# Altium PCB PCB.PcbDoc
Units mil, origin at the board's own origin, x right, y up, seen from the top; angles counter-clockwise.
Board outline 6000 x 4000 mil, 2 copper layers (Top Layer, Bottom Layer); 37 components, 25 nets, 108 pads, 0 vias.
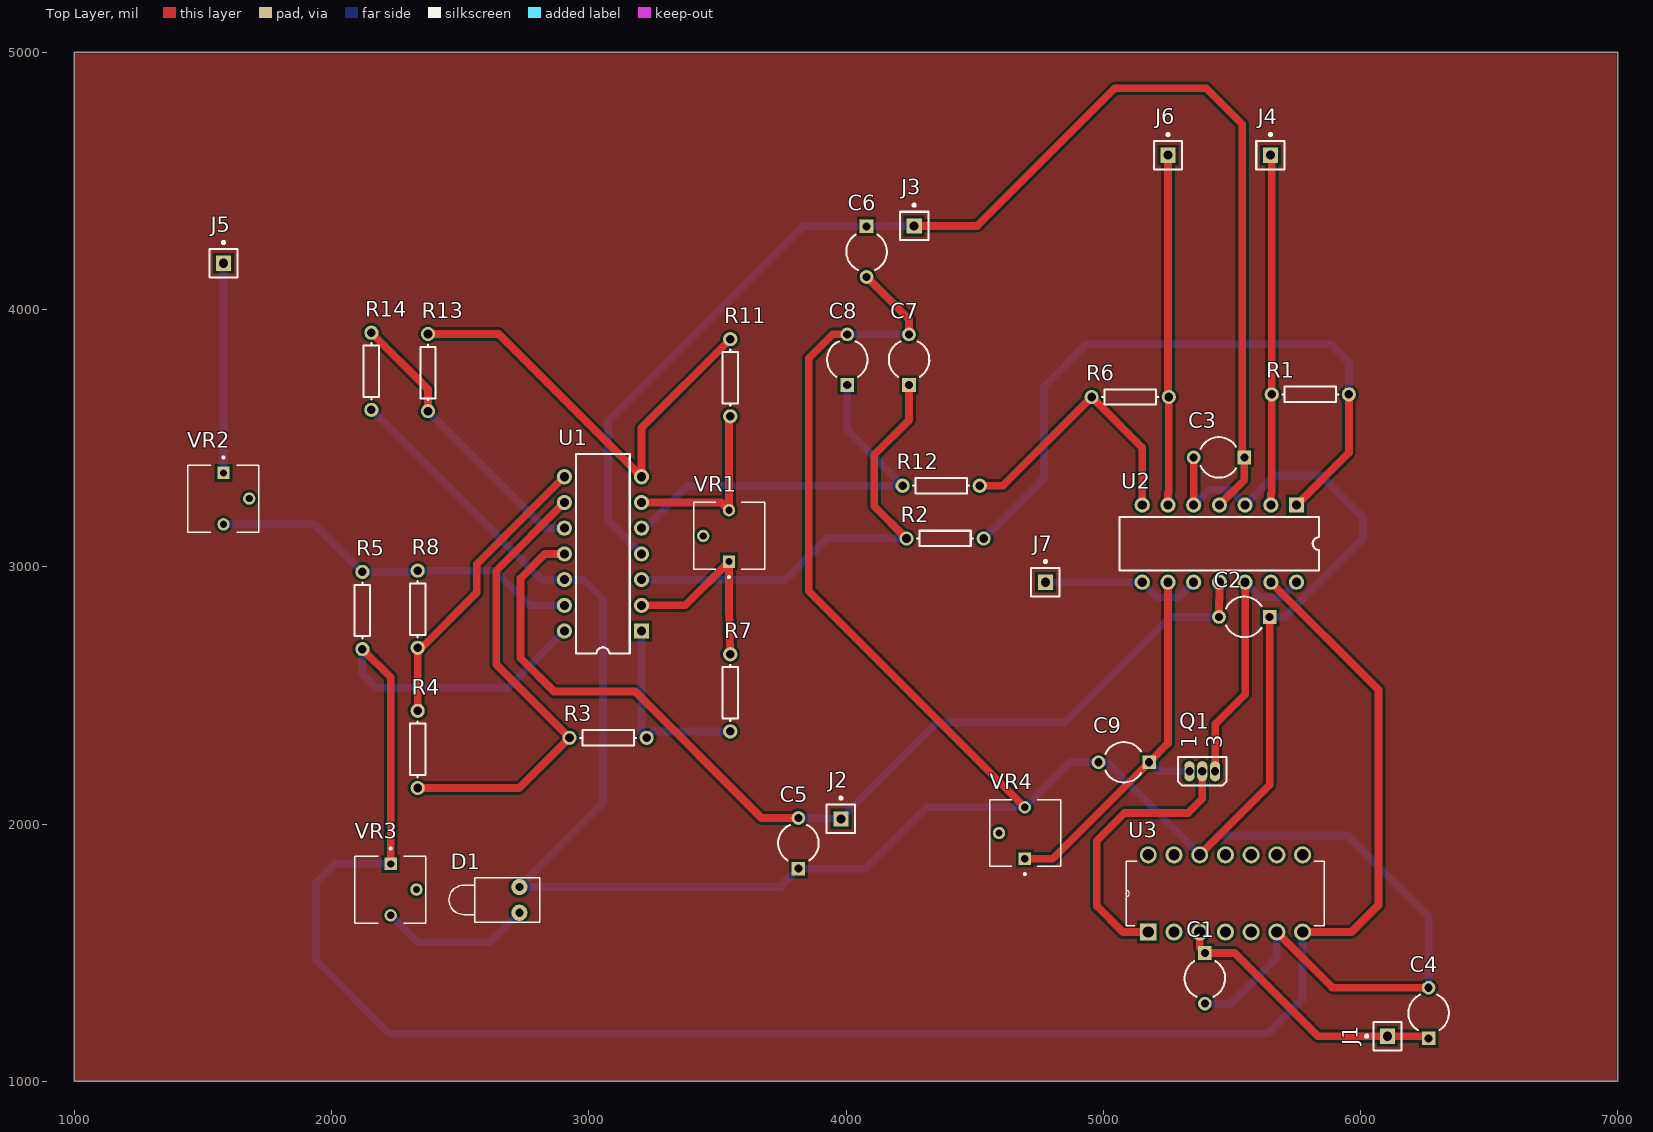
[diagram p0: Top Layer view]
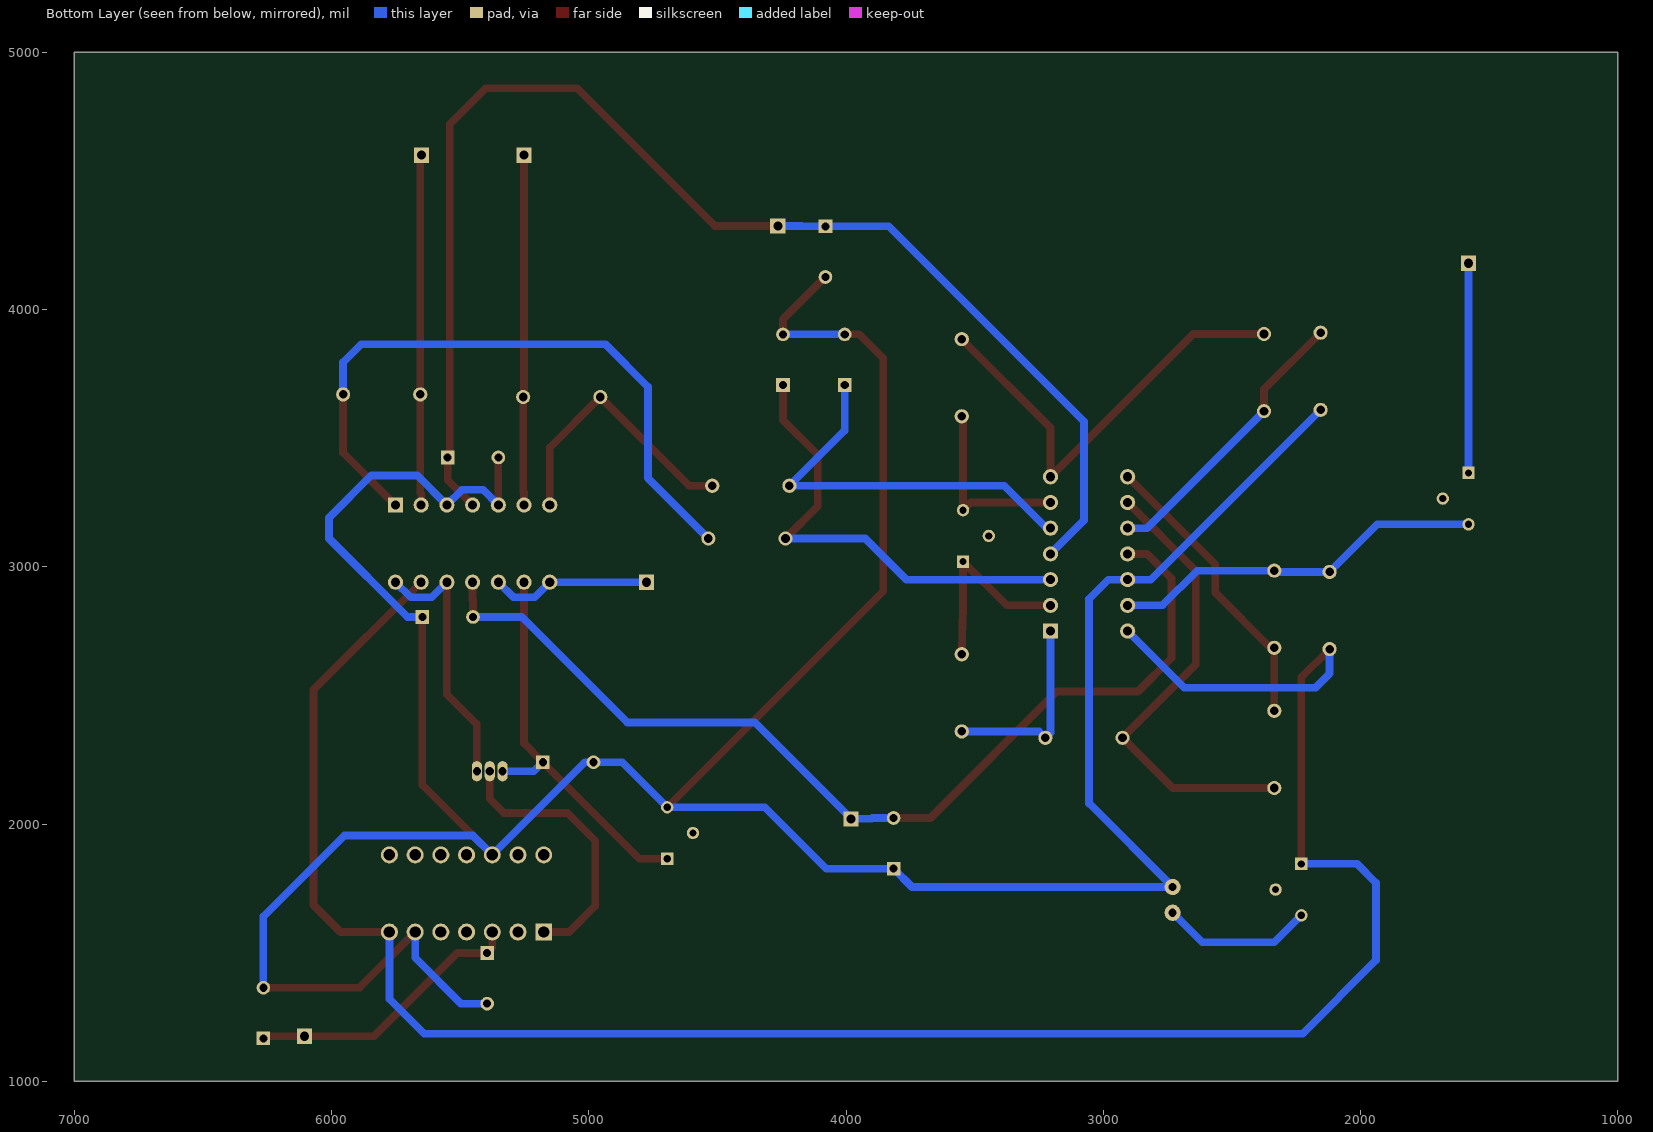
[diagram p1: Bottom Layer view, seen from below]

## Layer stack, top to bottom
Top Solder: solder mask 0.4, Solder Resist, Dk 3.5
Top Layer: signal copper 1.4
Dielectric 1: dielectric 12.6, FR-4, Dk 4.8
Bottom Layer: signal copper 1.4
Bottom Solder: solder mask 0.4, Solder Resist, Dk 3.5

## Board outline
1000,1000 7000,1000 7000,5000 1000,5000

## Design rules (kind name [scope] priority, off if disabled: settings)
Clearance [All] p1: gap=10 ignorepadtopadclearanceinfootprint=FALSE except(0: Arc-Hole Track-Hole SMDPad-Hole THPad-Hole Via-Hole Fill-Hole Poly-Hole Region-Hole Text-Hole)
PolygonConnect [All] p1: connectstyle=Relief reliefconductorwidth=10 reliefentries=4 polygonreliefangle="90 Angle" airgapwidth=10
RoutingVias [All] p1: holewidth=28 width=50 viastyle="Through Hole" minholewidth=28 minwidth=50 maxholewidth=28 maxwidth=50
SolderMaskExpansion [All] p1: expansion=4
Width [All] p1: maxlimit=30 minlimit=10 preferedwidth=30
30 further rules are at their usual default settings.

## Classes and differential pairs
component class Sheet1: C1 C2 C3 C4 C6 C7 C8 C9 D1 J1 J2 J3 J4 J5 J6 J7 Q1 R1 R2 R3 R4 R5 R6 R7 R8 R11 R12 R13 R14 U2 U3 VR1 VR2 VR4

## Components (designator, comment, footprint, x,y, rotation, side; value= is the part's Value field where it differs from the comment)
C1 "Cap2" CAPR5-4X5 5395,1400 r270 top value=100nF
C2 "Cap2" CAPR5-4X5 5548.43,2805 r180 top value=100pF
C3 "Cap2" CAPR5-4X5 5450,3425 r180 top value=100nF
C4 "Cap2" CAPR5-4X5 6265,1265 r90 top value=1uF
C5 "Cap2" CAPR5-4X5 3815,1925 r90 top value=1uF
C6 "Cap2" CAPR5-4X5 4080,4225 r270 top value=1uF
C7 "Cap2" CAPR5-4X5 4245,3805 r90 top value=100nF
C8 "Cap2" CAPR5-4X5 4005,3805 r90 top value=100nF
C9 "Cap2" CAPR5-4X5 5080,2240 r180 top value=100nF
D1 "LED1" LED-1 2730,1705 r180 top
J1 "Socket" PIN1 6105,1175 r90 top
J2 "Socket" PIN1 3980,2020 r0 top
J3 "Socket" PIN1 4265,4325 r0 top
J4 "Socket" PIN1 5650,4600 r0 top
J5 "Socket" PIN1 1580,4180 r0 top
J6 "Socket" PIN1 5251.57,4600 r0 top
J7 "Socket" PIN1 4775,2940 r0 top
Q1 "MOSFET-N" E3 5385,2205 r90 top
R1 "Res1" AXIAL-0.3 5805,3670 r0 top value=560K
R2 "Res1" AXIAL-0.3 4385,3110 r180 top value=150K
R3 "Res1" AXIAL-0.3 3075,2335 r180 top value=1K
R4 "Res1" AXIAL-0.3 2335,2290 r90 top value=1K
R5 "Res1" AXIAL-0.3 2120,2830 r270 top value=1K
R6 "Res1" AXIAL-0.3 5105,3660 r180 top value=560K
R7 "Res1" AXIAL-0.3 3550,2510 r270 top value=4.7K
R8 "Res1" AXIAL-0.3 2335,2835 r90 top value=1K
R11 "Res1" AXIAL-0.3 3550,3735 r270 top value=4.7K
R12 "Res1" AXIAL-0.3 4370,3315 r180 top value=150K
R13 "Res1" AXIAL-0.3 2375,3755 r270 top value=1K
R14 "Res1" AXIAL-0.3 2155,3760 r270 top value=1K
U1 "LM348N" N014 3055,3050 r90 top
U2 "LM348N" N014 5451.57,3090 r180 top
U3 "LM2901N" *DIP254P762X508-14 5775,1880 r90 top
VR1 "3362P-1-503LF" *TRIM_3362P-1-503LF 3545,3120 r90 top
VR2 "3362P-1-503LF" *TRIM_3362P-1-503LF 1580,3265 r270 top
VR3 "3362P-1-503LF" *TRIM_3362P-1-503LF 2230,1745 r270 top
VR4 "3362P-1-503LF" *TRIM_3362P-1-503LF 4695,1965 r90 top

## Footprints (in the part's own frame and the unit in brackets; to place one, negate y for a bottom-side part, rotate by r counter-clockwise, add the part's x,y. Pads: shape width x height; smd on the part's side, far side on the other; paste and mask are expansions set on the pad)
*DIP254P762X508-14 [mil]
  rect 66x66 hole 44: 1(-300,600)
  round 66 hole 44: 2(-300,500) 3(-300,400) 4(-300,300) 5(-300,200) 6(-300,100) 7(-300,0) 8(0,0) 9(0,100) 10(0,200) 11(0,300) 12(0,400) 13(0,500) 14(0,600)
  silkscreen extent -275,-85 -25,685
*TRIM_3362P-1-503LF [mil]
  rect 48.11x48.11 hole 28.11: 1(-100,0)
  round 48.11 hole 28.11: 2(0,100) 3(100,0)
  silkscreen extent -164,-139 130,137
AXIAL-0.3 [mm] "Axial Device, Thru-Hole; 2 Leads; 0.3 in Pin Spacing"
  round 1.4 hole 0.85: 1(-3.81,0) 2(3.81,0)
  silkscreen extent -2.77,-0.76 2.77,0.76
CAPR5-4X5 [mm] "Capacitor; 2 Leads"
  rect 1.35x1.35 hole 0.8: 1(-2.5,0)
  round 1.35 hole 0.8: 2(2.5,0)
  silkscreen extent -1.69,-2 1.82,2
E3 [mm] "TO, Flat Index; 3 In-Line, Axial Leads; Body Dia. 4.6mm; Lead Dia. 0.5 mm (max)"
  oval 2x1 hole 0.8: 1(0,1.27) 2(0,0) 3(0,-1.27)
  silkscreen extent -1.41,-2.41 1.41,2.41
LED-1 [mm] "LED; 2 Leads"
  round 1.6 hole 0.8: 1(0,1.27) 2(0,-1.27)
  silkscreen extent -2,-2.2 6.95,2.2
N014 [mm] "DIP; 14 Leads; Row Spacing 7.62 mm; Pitch 2.54 mm"
  rect 1.5x1.5 hole 0.9: 1(-7.62,-3.81)
  round 1.5 hole 0.9: 2(-5.08,-3.81) 3(-2.54,-3.81) 4(0,-3.81) 5(2.54,-3.81) 6(5.08,-3.81) 7(7.62,-3.81) 8(7.62,3.81) 9(5.08,3.81) 10(2.54,3.81) 11(0,3.81) 12(-2.54,3.81) 13(-5.08,3.81) 14(-7.62,3.81)
  silkscreen extent -9.85,-2.65 9.85,2.65
PIN1 [mm] "Connector; Plug"
  rect 1.5x1.5 hole 0.9: 1(0,0)
  silkscreen extent -1.4,-1.4 1.4,2.17

## Part data
C1 C2 C3 C4 C5 C6 C7 C8 C9: "Capacitor", PackageDescription="Capacitor; 2 Leads", PackageReference=CAPR5-4X5, Published=23-Sep-2002, Publisher="Altium Limited"
D1: "Typical RED GaAs LED", LatestRevisionDate=08-Jul-2005, LatestRevisionNote="Mech Layer 1 removed.", PackageDescription="LED; 2 Leads", PackageReference=LED-1, Published=8-Jun-2000, Publisher="Altium Limited"
Q1: "N-Channel MOSFET", LatestRevisionDate=17-Jul-2002, LatestRevisionNote="Re-released for DXP Platform.", PackageDescription="TO, Flat Index; 3 In-Line, Axial Leads; Body Dia. 4.6mm; Lead Dia. 0.5 mm (max)", PackageReference=E3, PackageVersion=1995/1996, Published=8-Jun-2000, Publisher="Altium Limited"
R1 R2 R3 R4 R5 R6 R7 R8 R11 R12 R13 R14: "Resistor", LatestRevisionDate=17-Jul-2002, LatestRevisionNote="Re-released for DXP Platform.", PackageDescription="Axial Device, Thru-Hole; 2 Leads; 0.3 in Pin Spacing", PackageReference=AXIAL-0.3, Published=8-Jun-2000, Publisher="Altium Limited"
U1 U2: "Quadruple Operational Amplifier", ComponentLink1Description="Manufacturer Link", ComponentLink1URL=http://www.ti.com/, ComponentLink2Description=Datasheet, ComponentLink2URL=http://www-s.ti.com/sc/ds/lm348.pdf, DatasheetVersion=Aug-1996, LatestRevisionDate=04-Mar-2005, LatestRevisionNote="Stylized 3D Model Added.", PackageDescription="DIP; 14 Leads; Row Spacing 7.62 mm; Pitch 2.54 mm", PackageReference=N014, PackageVersion=Oct-1995, Published=16-Jan-2001, Publisher="Altium Limited"
U3: "Low Power Low Offset Voltage Quad Comparator 14-PDIP -40 to 85", Package="PDIP-14 Texas Instruments", Availability=Unavailable, MF="Texas Instruments", MP=LM2901N/NOPB, Price=None, SnapEDA_Link=https://www.snapeda.com/parts/LM2901N/NOPB/Texas%20Instruments/view-part/?ref=snap
VR1 VR2 VR3 VR4: "Res Cermet Trimmer 50K Ohm 10% 1/2W 1_Elec_/1_Mech_Turn 2.77mm _6.6 X 6.99 X 4.7mm_ Pin Thru-Hole Tube", Package=Bourns, Digi-Key_Part_Number=3362P-503LF-ND, Digi-Key_Purchase_URL=https://www.digikey.co.nz/product-detail/en/bourns-inc/3362P-1-503LF/3362P-503LF-ND/1003342?utm_source=snapeda&utm_medium=aggregator&utm_campaign=symbol, MF=Bourns, MP=3362P-1-503LF, SnapEDA_Link=https://www.snapeda.com/parts/3362P-1-503LF/Bourns%20-%20J.W.%20Miller/view-part/?ref=snap
J1 J2 J3 J4 J5 J6 J7: LatestRevisionDate=17-Jul-2002, LatestRevisionNote="Re-released for DXP Platform.", Publisher="Altium Limited"

## Nets (pads, with @x,y where several pads share a name; then routed paths per layer and width w, separated by ;. In a path a pad name is that pad's centre, name@x,y a point inside that pad or via, vN(x,y) a via of type N, cw(c..) or ccw(c..) an arc to the next point about the centre after c; other vN are vias at no path point)
+VCC: C3.1 C6.1 J3.1 U1.4 U2.4 | length 5151.9
  Top Layer w30: J3.1 4510,4325 5045,4860 5400,4860 5540,4720 5540,3433.43 C3.1 5548.43,3336.85 U2.4
  Bottom Layer w30: U1.4 3075,3180 3075,3565 3833.43,4323.43 C6.1 4171,4323.43 4172.57,4325 J3.1
+VCC2: C1.1 C4.1 J1.1 U3.3 | length 1097.3
  Top Layer w30: U3.3 5375,1518.43 C1.1 5511.57,1498.43 5835,1175 J1.1 6256.58,1175 C4.1
-VCC: C2.2 C5.2 J2.1 U1.11 U2.11 | length 3954
  Top Layer w30: U1.11 2830,3050 2735,2955 2735,2645 2865,2515 3180,2515 3671.57,2023.43 C5.2 ; C2.2 5450,2871 5451.57,2872.57 U2.11
  Bottom Layer w30: C5.2 3896.57,2023.43 3900,2020 J2.1 4355,2395 4850,2395 5260,2805 C2.2
GND: C1.2 C2.1 C3.2 C4.2 C5.1 C6.2 C7.2 C8.2 C9.2 D1.2 R14.2 U1.12 U2.3 U2.5 U3.6 U3.12 VR4.3 | length 13344.3
  Top Layer w30: C8.2 3948.43,3903.43 3855,3810 3855,2905 VR4.3 ; C6.2 4245,3961.57 C7.2 ; U2.5 C3.2 ; U3.12 5646.85,2151.85 C2.1 ; U3.6 5891.57,1363.43 C4.2
  Bottom Layer w30: R14.2 2815,2950 U1.12 2980,2950 3055,2875 3055,2080 D1.2 3743.43,1755 C5.1 4077,1826.57 4315.43,2065 VR4.3 4870,2240 C9.2 5015,2240 U3.12 5450,1955 5950,1955 6265,1640 C4.2 ; C8.2 C7.2 ; U2.5 5410.57,3299 5492.57,3299 U2.3 5666.57,3355 5845,3355 6010,3190 6010,3110 5705,2805 C2.1 ; C1.2 5496.57,1301.57 5675,1480 U3.6
NetC7_1: C7.1 R2.2 U1.3 | length 1800.5
  Top Layer w30: R2.2 4110,3235 4110,3435 4245,3570 C7.1
  Bottom Layer w30: U1.3 3765,2950 3925,3110 R2.2
NetC8_1: C8.1 R12.2 U1.5 | length 1564
  Bottom Layer w30: U1.5 3220,3150 3385,3315 R12.2 4005,3530 C8.1
NetC9_1: C9.1 Q1.1 U2.9 VR4.1 | length 1540.1
  Top Layer w30: VR4.1 4803.43,1865 C9.1 5251.57,2313.15 U2.9
  Bottom Layer w30: C9.1 5213.43,2205 Q1.1
NetD1_1: D1.1 VR3.3 | length 591.1
  Bottom Layer w30: VR3.3 2335,1540 2615,1540 D1.1
NetJ4_1: J4.1 R1.1 U2.2 | length 1363.5
  Top Layer w30: J4.1 5655,4595 R1.1 5655,3287 5651.57,3283.57 U2.2
NetJ5_1: J5.1 VR2.1 | length 815
  Bottom Layer w30: VR2.1 J5.1
NetJ6_1: J6.1 R6.1 U2.6 | length 1362.8
  Top Layer w30: U2.6 5251.57,3287.57 5255,3291 R6.1 5251.57,3663.43 J6.1
NetJ7_1: J7.1 U2.8 U2.10 | length 625.5
  Bottom Layer w30: J7.1 U2.8 5210.57,2881 5292.57,2881 U2.10
NetQ1_2: Q1.2 U3.1 | length 1080
  Top Layer w30: U3.1 5076.57,1580 4975,1681.57 4975,1935 5083,2043 5330,2043 5385,2098 Q1.2
NetQ1_3: Q1.3 U2.12 U2.14 | length 1032.2
  Top Layer w30: Q1.3 5435,2388.43 5551.57,2505 U2.12
  Bottom Layer w30: U2.12 5610.57,2881 5692.57,2881 U2.14
NetR1_2: R1.2 R2.1 U2.1 | length 2608.9
  Top Layer w30: U2.1 5955,3443.43 R1.2
  Bottom Layer w30: R2.1 4770,3345 4770,3700 4935,3865 5885,3865 5955,3795 R1.2
NetR3_1: R3.1 R7.2 U1.1 | length 758.6
  Bottom Layer w30: U1.1 3205,2355 R3.1 3250,2360 R7.2
NetR3_2: R3.2 R4.1 U1.9 | length 1813.6
  Top Layer w30: R4.1 2730,2140 R3.2 2640,2620 2640,2985 U1.9
NetR4_2: R4.2 R8.1 U1.8 | length 1154.9
  Top Layer w30: R4.2 R8.1 2350,2685 2565,2900 2565,3010 U1.8
NetR5_1: R5.1 R8.2 U1.13 VR2.3 | length 1459.6
  Bottom Layer w30: VR2.3 1935,3165 R5.1 2330,2980 R8.2 2635,2985 2770,2850 U1.13
NetR5_2: R5.2 U1.14 U2.13 U3.7 VR3.1 | length 8532.2
  Top Layer w30: R5.2 2230,2570 VR3.1 ; U2.13 6070,2521.57 6070,1685 5965,1580 U3.7
  Bottom Layer w30: R5.2 2120,2585 2175,2530 2685,2530 U1.14 ; VR3.1 2013.43,1845 1940,1771.57 1940,1470 2225,1185 5640,1185 5775,1320 U3.7
NetR6_2: R6.2 R12.1 U2.7 | length 1079.3
  Top Layer w30: R12.1 4610,3315 R6.2 5151.57,3463.43 U2.7
NetR7_1: R7.1 U1.2 VR1.1 | length 770.5
  Top Layer w30: U1.2 3375,2850 VR1.1 3545,2845 R7.1
NetR11_1: R11.1 R13.1 U1.7 | length 1737.8
  Top Layer w30: R13.1 2650,3905 U1.7 3205,3540 R11.1
NetR11_2: R11.2 U1.6 VR1.3 | length 719.5
  Top Layer w30: U1.6 3515,3250 VR1.3 3545,3580 R11.2
NetR13_2: R13.2 R14.1 U1.10 | length 1114.6
  Top Layer w30: R14.1 2375,3690 R13.2
  Bottom Layer w30: R13.2 2830,3150 U1.10
pads on no net: U3.2 U3.4 U3.5 U3.8 U3.9 U3.10 U3.11 U3.13 U3.14 VR1.2 VR2.2 VR3.2 VR4.2

## Polygon pours and split planes (outlines as drawn)
no net on Top Layer "Top Layer-No Net" (solid, pour order 16): 7790,2980
no net on Top Layer "Top Layer-No Net 1" (solid, pour order 14): 6655,4445
no net on Top Layer "Top Layer-No Net 2" (solid, pour order 12): 7745,3375
no net on Top Layer "Top Layer-No Net 3" (solid, pour order 10): 7370,3400
no net on Top Layer "Top Layer-No Net 4" (solid, pour order 8): 1000,4995 1000,1000 6995,1000 6995,4995

## Text inside footprints (layer, text, board x,y; h text height)
Q1: Top Overlay "1" at 5363.15,2294.57 h59.05 r90; Top Overlay "3" at 5462.28,2294.57 h59.05 r90